# Altium PCB Tigershark 3D R2.PcbDoc (part 4 of 4)
Units mil, origin at the board's own origin, x right, y up, seen from the top; angles counter-clockwise.
Board outline 4100 x 4050 mil, 4 copper layers (Top Layer, Groun Plane, Power Plane, Bottom Layer), stack 61.73 mil thick; 349 components, 235 nets, 1133 pads, 579 vias.
Unrouted connection lines stored in the file: 67.
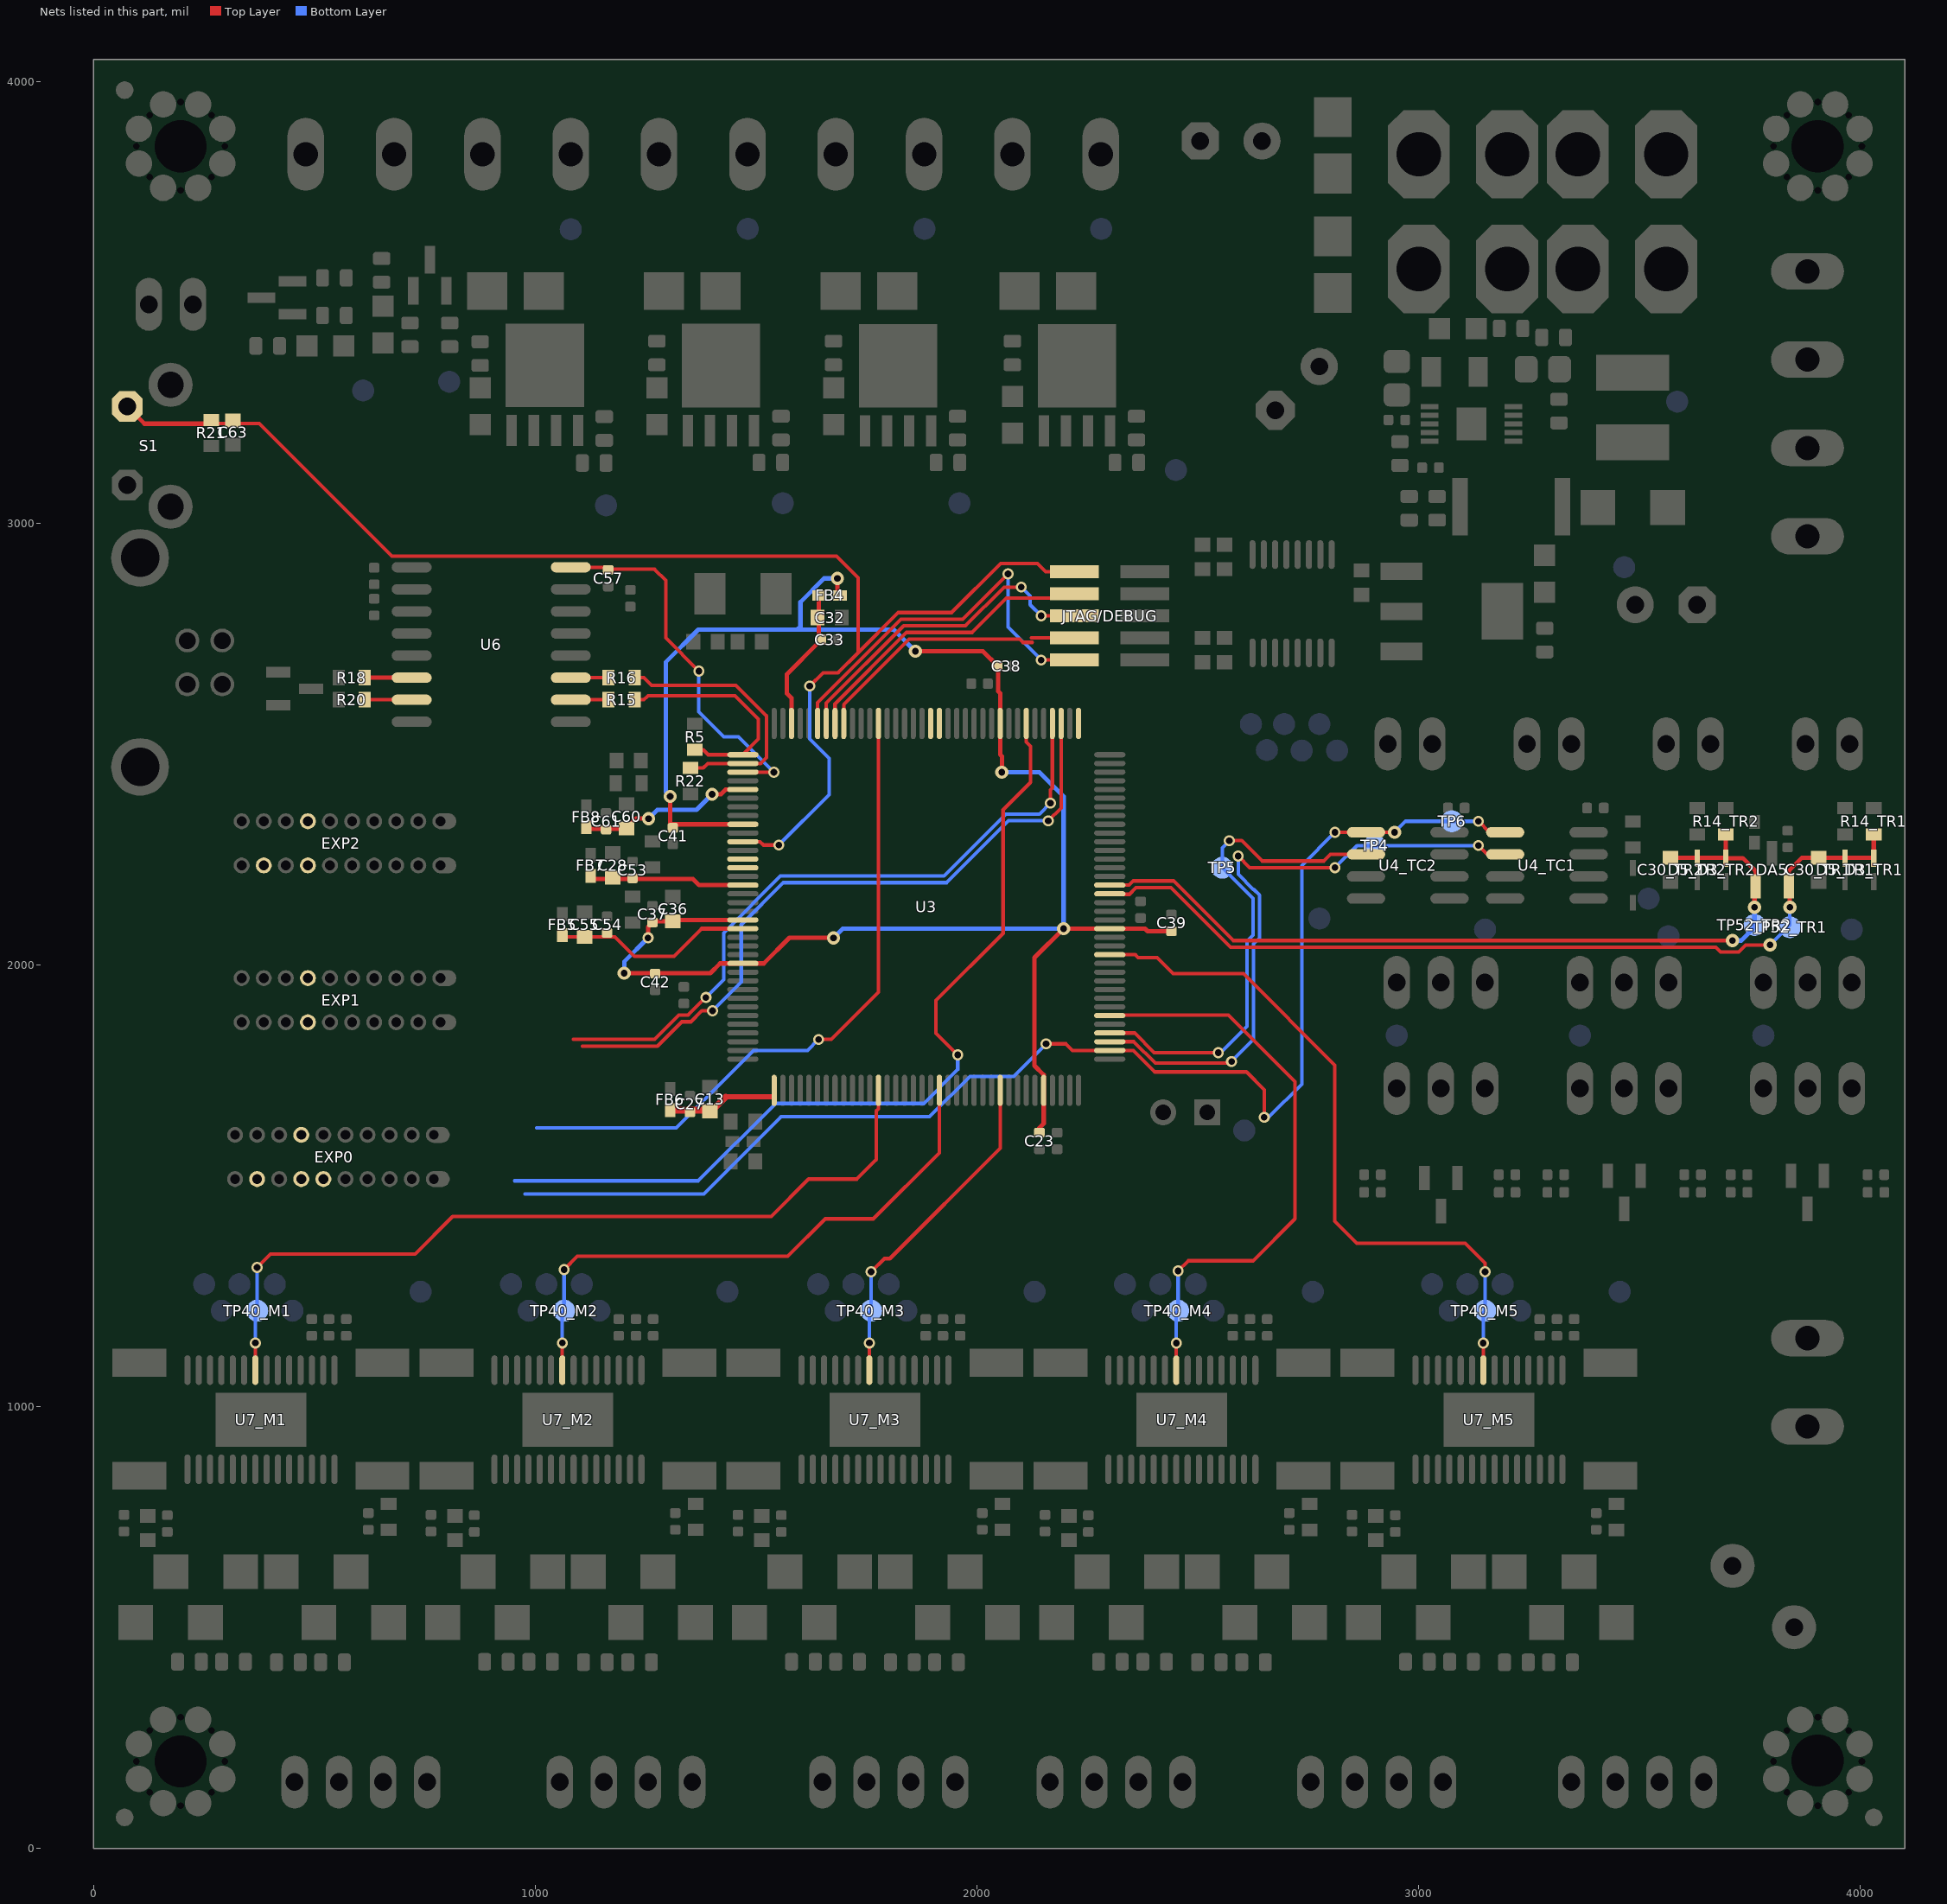
[diagram p6: the nets of this part, all layers, seen from the top]

## Via types
v1: diameter 30, hole 15, Top Layer to Bottom Layer, tented both sides, 304 vias
v2: diameter 25, hole 15, Top Layer to Bottom Layer, tented both sides, 108 vias
v3: diameter 25, hole 15, Top Layer to Bottom Layer, 81 vias
v4: diameter 19.68, hole 7.87, Top Layer to Bottom Layer, 75 vias
v5: diameter 30, hole 15, Top Layer to Bottom Layer, 9 vias
v6: diameter 45, hole 20, Top Layer to Bottom Layer, tented both sides, 2 vias

## Nets (pads, with @x,y where several pads share a name; then routed paths per layer and width w, separated by ;. In a path a pad name is that pad's centre, name@x,y a point inside that pad or via, vN(x,y) a via of type N, cw(c..) or ccw(c..) an arc to the next point about the centre after c; other vN are vias at no path point) (continued)
RESET: C63.2 EXP0.5 JTAG/DEBUG.10 R21.1 S1.1 U3.47 | length 3211.5
  Top Layer w8: R21.1@257.47,3225 R21.1@266,3233.53 ; R21.1@274.53,3225 375,3225 675,2925 1681.93,2925 1730.47,2876.46 1730.47,2706.46 ; U3.47@1469.65,2278.74 1508.46,2278.74 1516.1,2271.1 v2(1551.1,2271.1) ; v2(1621.1,2631.1) 1651.1,2661.1 1685.12,2661.1 1730.47,2706.46 ; JTAG/DEBUG.10@2220.08,2890 2155,2890 2136.5,2908.5 2053.5,2908.5 1942.46,2797.46 1821.47,2797.46 1730.47,2706.46
  Top Layer w10: S1.1@76,3264 115,3225 R21.1@257.47,3225
  Bottom Layer w8: v2(1551.1,2271.1) 1665,2385 1665,2467.2 1621.1,2511.1 v2(1621.1,2631.1)
RXD0: EXP2.17 U3.3 | length 1574.6
  Top Layer w8: 1106.25,1816.1 1276.25,1816.1 1331.15,1871 1351.89,1871 1376.99,1896.1 v2(1401.1,1896.1) ; v2(2161.1,2326.1) 2190.12,2355.12 U3.3@2190.12,2546.46
  Bottom Layer w8: v2(1401.1,1896.1) 1466.1,1961.1 1466.1,2091.1 1561.1,2186.1 1931.1,2186.1 2071.1,2326.1 v2(2161.1,2326.1)
RXD1: EXP0.17 U3.18
SCLK: EXP0.2 EXP2.2 TP6.1 U3.110 U4_TC1.5 U4_TC2.5 | length 3043.3
  Top Layer w8: v2(2156.1,1821.1) 2201.1,1821.1 2215.91,1806.3 U3.110@2300.35,1806.3 2353.48,1806.3 2402.18,1757.6 2609.6,1757.6 2650,1717.2 v2(2650,1655) ; v2(2810,2300) U4_TC2.5@2880.51,2300 v1(2945,2300) ; v2(3135,2325) 3160,2300 U4_TC1.5@3195.51,2300
  Bottom Layer w8: 976.1,1481.1 1381.1,1481.1 1556.1,1656.1 1892.32,1656.1 1983.82,1747.6 2082.6,1747.6 v2(2156.1,1821.1) ; v2(2650,1655) 2660,1655 2735,1730 2735,2225 v2(2810,2300) ; v1(2945,2300) 2970,2325 v2(3135,2325)
SHDN: U3.50
SPD: U3.1
STEP1: TP40_M1.1 U3.85 U7_M1.22 | length 1887.3
  Top Layer w8: U7_M1.22@365.94,1083.46 v3(365.94,1143.9) ; v3(370,1315) 400,1345 727.57,1345 812.57,1430 1533.64,1430 1618.64,1515 1728.02,1515 1772.05,1559.03 1772.05,1669.47 1776.73,1674.16 U3.85@1776.73,1715.75
  Bottom Layer w8: v3@365.74,1144.1 v3(365.94,1143.9) 365.94,1213.01 TP40_M1.1@369.97,1217.03 v3@369.97,1307.03
STEP2: TP40_M2.1 U3.92 U7_M2.22 | length 1326
  Top Layer w8: U7_M2.22@1060.94,1083.46 v3(1060.94,1143.9) ; v3(1065,1310) 1095,1340 1570.92,1340 1655.92,1425 1765.29,1425 1914.53,1574.23 U3.92@1914.53,1715.75
  Bottom Layer w8: v3@1060.74,1144.1 v3(1060.94,1143.9) 1060.94,1213.01 TP40_M2.1@1064.97,1217.03 v3@1064.97,1307.03
STEP3: TP40_M3.1 U3.99 U7_M3.22 | length 764.7
  Top Layer w8: U7_M3.22@1755.94,1083.46 v3(1755.94,1143.9) ; v3(1760,1305) 1790,1335 1802.57,1335 2052.32,1584.75 U3.99@2052.32,1715.75
  Bottom Layer w8: v3@1755.74,1144.1 v3(1755.94,1143.9) 1755.94,1213.01 TP40_M3.1@1759.97,1217.03 v3@1759.97,1307.03
STEP4: TP40_M4.1 U3.114 U7_M4.22 | length 1332.2
  Top Layer w8: U3.114@2300.35,1885.04 2301.42,1886.1 2569.19,1886.1 2720,1735.29 2720,1425 2625,1330 2478,1330 v3(2455,1307) ; U7_M4.22@2450.98,1083.43 v3(2450.98,1143.87)
  Bottom Layer w8: v3@2450.77,1144.07 v3(2450.98,1143.87) 2450.98,1212.98 TP40_M4.1@2455,1217 v3(2455,1307)
STEP5: TP40_M5.1 U3.121 U7_M5.22 | length 1591.1
  Top Layer w8: U3.121@2300.35,2022.83 2358.16,2022.83 2364.89,2016.1 2407.32,2016.1 2443.69,1979.72 2602.85,1979.72 2810,1772.57 2810,1419.34 2859.34,1370 3105,1370 3150,1325 v3(3150,1305) ; U7_M5.22@3145.98,1083.43 v3(3145.98,1143.87)
  Bottom Layer w8: v3@3145.77,1144.07 v3(3145.98,1143.87) 3145.98,1212.98 TP40_M5.1@3150,1217 v3(3150,1305) v3@3150,1307
STEP_EXP1: EXP1.4 U3.7 | length 2004.4
  Top Layer w8: v2(1956.1,1796.1) 1906.71,1845.5 1906.71,1919.28 2058.86,2071.43 2058.86,2350.83 2121,2412.97 2121,2494.99 2111.38,2504.61 U3.7@2111.38,2546.46
  Bottom Layer w8: 952.76,1511.1 1368.68,1511.1 1543.68,1686.1 1879.34,1686.1 1956.1,1762.87 v2(1956.1,1796.1)
STEP_EXP2: EXP1.17 U3.24 | length 1509.9
  Top Layer w8: v2(1641.1,1831.1) 1669.89,1831.1 1776.73,1937.95 U3.24@1776.73,2546.46
  Bottom Layer w8: 1002.46,1631.1 1318.97,1631.1 1493.97,1806.1 1616.1,1806.1 v2(1641.1,1831.1)
TC_CS1: TP4.1 U3.111 U4_TC1.6 | length 1453.6
  Top Layer w8: U3.111@2300.35,1825.98 2355.01,1825.98 2403.39,1777.6 2572.6,1777.6 v2(2576.1,1781.1) ; v2(2591.1,2246.1) 2617.2,2220 v2(2810,2220) ; v2(3135,2270) 3155,2250 U4_TC1.6@3195.51,2250
  Bottom Layer w8: v2(2576.1,1781.1) 2626.1,1831.1 2626.1,2047.2 2639.6,2060.7 2639.6,2157.71 2626.21,2171.1 2625,2171.1 2591.1,2205 v2(2591.1,2246.1) ; v2(2810,2220) 2860,2270 v2(3135,2270)
TC_CS2: TP5.1 U3.112 U4_TC2.6 | length 1149.9
  Top Layer w8: U3.112@2300.35,1845.67 2356.54,1845.67 2401.1,1801.1 v2(2546.1,1801.1) ; v2(2571.1,2281.1) 2598.9,2281.1 2645,2235 2785,2235 2800,2250 U4_TC2.6@2880.51,2250
  Bottom Layer w8: v2(2546.1,1801.1) 2551.1,1801.1 2611.1,1861.1 2611.1,2053.42 2624.6,2066.92 2624.6,2150.29 TP5.1@2555,2219.89 2555,2265 v2(2571.1,2281.1)
TCK/SWDCLK: JTAG/DEBUG.4 U3.28 | length 631.3
  Top Layer w8: U3.28@1697.99,2546.46 1697.99,2589.12 1846.33,2737.46 2096.24,2737.46 2103.7,2730 2125,2730 ; 2123,2740 JTAG/DEBUG.4@2220.08,2740
TDI: JTAG/DEBUG.8 U3.29 | length 689.3
  Top Layer w8: U3.29@1678.31,2546.46 1678.31,2590.65 1840.11,2752.46 1988.67,2752.46 2066.21,2830 2210.08,2830 JTAG/DEBUG.8@2220.08,2840
TDO/SWO: JTAG/DEBUG.6 U3.30 | length 754.7
  Top Layer w8: U3.30@1658.62,2546.46 1658.62,2592.18 1833.9,2767.46 1973.67,2767.46 2061.21,2855 v2(2100,2855) ; v2(2145,2790) JTAG/DEBUG.6@2220.08,2790
  Bottom Layer w8: v2(2100,2855) 2120,2835 2120,2815 v2(2145,2790)
THERM_AN1: C30_TR1.2 D3_TR1.1 D5_TR1.2 DA5.2 R14_TR1.1 TP52_TR1.1 U3.128 | length 2003.6
  Top Layer w8: U3.128@2300.35,2160.63 2301.35,2159.63 2344.63,2159.63 2360,2175 2438.79,2175 2573.79,2040 3672.37,2040 3683.37,2029 3724,2029 3740,2045 v1(3795,2045)
  Top Layer w10: v1(3840,2130) 3840,2175 DA5.2@3837.4,2177.6 3837.4,2212.4 3867.56,2242.56 C30_TR1.2@3905,2242.56 D3_TR1.1@4029.02,2242.56 ; D3_TR1.1@4030,2241.57 R14_TR1.1@4030,2295.47
  Bottom Layer w8: v1(3795,2045) 3840,2090 v1@3840,2120
THERM_AN2: C30_TR2.2 D3_TR2.1 D5_TR2.2 DA5.1 R14_TR2.1 TP52_TR2.1 U3.129 | length 1908.1
  Top Layer w8: U3.129@2300.35,2180.32 2344.1,2180.32 2353.79,2190 2445,2190 2580,2055 v1(3710,2055)
  Top Layer w10: C30_TR2.2@3570,2242.56 D3_TR2.1@3694.02,2242.56 ; R14_TR2.1@3695,2295.47 D3_TR2.1@3695,2241.57 3733.43,2241.57 3762.6,2212.4 DA5.1@3762.6,2177.6 3760,2175 v1(3760,2130)
  Bottom Layer w10: v1(3710,2055) 3730,2055 3760,2085 v1@3760,2120
TMS/SWDIO: JTAG/DEBUG.2 U3.31 | length 900.1
  Top Layer w8: U3.31@1638.94,2546.46 1638.94,2593.71 1827.69,2782.46 1967.46,2782.46 v2(2070,2885) ; v2(2145,2690) JTAG/DEBUG.2@2220.08,2690
  Bottom Layer w8: v2(2070,2885) 2070,2765 v2(2145,2690)
TXD0: EXP2.4 U3.4 | length 1546
  Top Layer w8: 1086.1,1831.1 1270.04,1831.1 1324.93,1886 1345.68,1886 1385.78,1926.1 v2(1386.1,1926.1) ; v2(2166.1,2366.1) 2166.1,2396.1 2170.43,2400.43 U3.4@2170.43,2546.46
  Bottom Layer w8: v2(1386.1,1926.1) 1426.1,1966.1 1426.1,2072.32 1554.89,2201.1 1924.89,2201.1 2064.89,2341.1 2141.1,2341.1 v2(2166.1,2366.1)
TXD1: EXP0.4 U3.17
UD_N: R18.1 U6.6 | length 106.2
  Top Layer w10: R18.1@613.65,2650 U6.6@719.88,2650
UD_P: R20.1 U6.7 | length 106.2
  Top Layer w8: R20.1@613.65,2600 U6.7@719.88,2600
UI_N: R16.2 U6.11 | length 85.4
  Top Layer w8: U6.11@1080.12,2650 1130,2650 R16.2@1165.47,2650
UI_P: R15.2 U6.10 | length 85.4
  Top Layer w8: U6.10@1080.12,2600 1145,2600 R15.2@1165.47,2600
UMCU_N: R16.1 R22.1 U3.38 | length 606.6
  Top Layer w8: R16.1@1224.53,2650 1245.81,2650 1263.2,2632.6 1401.1,2632.6 1453.96,2632.6 1523,2563.56 1523,2468.91 1510,2455.91 U3.38@1469.65,2455.91 1390.28,2455.91 1380,2445.63 R22.1@1355,2445.63
UMCU_P: R5.1 R15.1 U3.37 | length 520.8
  Top Layer w8: R15.1@1224.53,2600 1245.81,2600 1253.13,2607.32 1255.16,2609.35 1451.75,2609.35 1505,2556.1 1505,2510.94 U3.37@1469.65,2475.59 1390.98,2475.59 1380,2486.57 R5.1@1361.1,2486.57 R5.1@1355,2486.57
VBUS: C57.2 U3.39 U6.16 | length 852
  Top Layer w8: U6.16@1080.12,2900 1159,2900 1163.65,2895.35 1269.65,2895.35 ; 1270,2895 1295,2870 1295,2740 v2(1370,2665) ; U3.39@1469.65,2436.22 v2@1540,2436.22
  Bottom Layer w8: v2(1370,2665) 1370,2572.87 1426.77,2516.1 1460,2516.1 v2(1540,2436.1)
VDDANA: C13.2 C27.2 FB6.2 U3.73 | length 247.4
  Top Layer w12: 1431.1,1701.1 U3.73@1540,1701.1
  Top Layer w15: FB6.2@1305,1671.1 1401.1,1671.1 1431.1,1701.1
VDDBU: C28.2 C53.2 FB7.2 U3.52 | length 355.2
  Top Layer w10: FB7.2@1123.62,2202.48 1131.6,2194.5 1356.6,2194.5 1370.79,2180.32 U3.52@1469.65,2180.32
VDDIN: C54.2 C55.2 FB5.2 U3.57 | length 471.3
  Top Layer w8: FB5.2@1056.22,2077.48 FB5.2@1060.16,2073.54 ; FB5.2@1058.94,2063.54 1179.83,2063.54 1224.37,2019 1314,2019 1376.89,2081.89 ; C54.2@1156.22,2073.54 C54.2@1163.66,2066.1
  Top Layer w10: 1376.89,2081.89 U3.57@1469.65,2081.89
VDDOUT: C23.2 C36.2 C37.2 C38.2 C39.2 C41.2 C42.2 FB4.1 U3.10 U3.45 U3.56 U3.61 U3.104 U3.124 | length 4400.6
  Top Layer w10: v1(1201.1,1981.1) 1396.1,1981.1 1418.15,2003.15 U3.61@1469.65,2003.15 1517.05,2003.15 1575,2061.1 v1(1675,2061.1) ; v2(1255,2061.1) 1255,2086 1267.54,2098.54 1305,2098.54 1308.03,2101.57 U3.56@1469.65,2101.57 ; v1(1305,2381.1) 1305,2318.66 C41.2@1305.53,2318.13 ; C41.2@1305.55,2318.11 U3.45@1469.65,2318.11 ; FB4.1@1683.62,2836.1 v1(1683.62,2874.72) ; v1(1860,2710) 2012.93,2710 C38.2@2046.47,2676.46 2047.47,2675.46 2047.47,2619.46 2052.32,2614.61 U3.10@2052.32,2546.46 2052.32,2475.98 2056.1,2472.2 v1(2056.1,2436.1) ; C23.2@2141.1,1620.1 2141.1,1631.1 2150.75,1640.75 U3.104@2150.75,1715.75 2150.75,1750.91 2130,1771.66 2130,2016.1 v1(2195.79,2081.89) U3.124@2300.35,2081.89 2380.22,2081.89 2386.01,2076.1 C39.2@2440,2076.1
  Bottom Layer w10: v1(1201.1,1981.1) 1201.1,2007.2 v2(1255,2061.1) ; v1(1305,2381.1) 1295,2391.1 1295,2685 1368.6,2758.6 1592.5,2758.6 ; v1(1675,2061.1) 1695.79,2081.89 v1(2195.79,2081.89) 2195.79,2381.42 2141.1,2436.1 v1(2056.1,2436.1) ; v1(1683.62,2874.72) 1653.62,2874.72 1600,2821.1 1600,2766.1 1592.5,2758.6 ; v1(1860,2710) 1811.4,2758.6 1592.5,2758.6
VDDPLL: C32.2 C33.2 FB4.2 U3.34 | length 326.1
  Top Layer w10: U3.34@1579.88,2546.46 1579.88,2603.63 1569.1,2614.41 1569.1,2657.44 1641.38,2729.72 1641.38,2831.1 FB4.2@1636.38,2836.1
VDDUTMI: C60.2 C61.2 FB8.2 U3.41 | length 380
  Top Layer w10: FB8.2@1115,2307.48 C60.2@1201.06,2307.48 ; C60.2@1212.56,2316.1 1227.56,2331.1 v1(1256.1,2331.1) ; v1(1400,2386.1) 1420,2386.1 1430.75,2396.85 U3.41@1469.65,2396.85
  Bottom Layer w10: v1@1260,2326.1 1260,2335 1276.1,2351.1 1365,2351.1 v1(1400,2386.1)
XOUT32: U3.49
pads on no net: FD1.1 FD2.1 FD3.1 H1.0 H2.0 H3.0 H4.0 JTAG/DEBUG.7 U3.32 U3.48 U3.127 U3.136 U3.137 U3.138 U4_TC1.8 U4_TC2.8 U7_M1.18 U7_M1.19 U7_M1.23 U7_M1.27 U7_M2.18 U7_M2.19 U7_M2.23 U7_M2.27 U7_M3.18 U7_M3.19 U7_M3.23 U7_M3.27 U7_M4.18 U7_M4.19 U7_M4.23 U7_M4.27 U7_M5.18 U7_M5.19 U7_M5.23 U7_M5.27

## Polygon pours and split planes (outlines as drawn)
GND on Top Layer "Mechanical 15-No Net" (solid, remove dead copper, pour order 71): 582.48,825 582.48,925 722.48,925 725,927.52 725,1358.26 596.74,1358.26 594.97,1360.03 589.97,1355.03 589.97,1225.03 589.97,1037.49 587.48,1035 587.45,1035.03 464.97,1035.03 212.51,1035.03 212.48,1035 209.97,1037.51 209.97,1355.03 29.97,1355.03 32.48,1352.52 32.48,925 162.48,925 187.48,900 542.48,900 542.48,825
GND on Top Layer "Mechanical 15-No Net" (solid, remove dead copper, pour order 71): 1277.48,825 1277.48,925 1417.48,925 1420,927.52 1420,1358.26 1291.74,1358.26 1289.97,1360.03 1284.97,1355.03 1284.97,1225.03 1284.97,1037.49 1282.48,1035 1282.45,1035.03 1159.97,1035.03 907.51,1035.03 907.48,1035 904.97,1037.51 904.97,1355.03 724.97,1355.03 727.48,1352.52 727.48,925 857.48,925 882.48,900 1237.48,900 1237.48,825
GND on Top Layer "Mechanical 15-No Net" (solid, remove dead copper, pour order 71): 1972.48,825 1972.48,925 2112.48,925 2115,927.52 2115,1358.26 1986.74,1358.26 1984.97,1360.03 1979.97,1355.03 1979.97,1225.03 1979.97,1037.49 1977.48,1035 1977.45,1035.03 1854.97,1035.03 1602.51,1035.03 1602.48,1035 1599.97,1037.51 1599.97,1355.03 1419.97,1355.03 1422.48,1352.52 1422.48,925 1552.48,925 1577.48,900 1932.48,900 1932.48,825
GND on Top Layer "Mechanical 15-No Net" (solid, remove dead copper, pour order 71): 2667.51,824.97 2667.51,924.97 2807.51,924.97 2810.03,927.49 2810.03,1358.23 2681.77,1358.23 2680,1360 2675,1355 2675,1225 2675,1037.46 2672.51,1034.97 2672.48,1035 2550,1035 2297.54,1035 2297.51,1034.97 2295,1037.48 2295,1355 2115,1355 2117.51,1352.49 2117.51,924.97 2247.51,924.97 2272.51,899.97 2627.51,899.97 2627.51,824.97
GND on Top Layer "Mechanical 15-No Net" (solid, remove dead copper, pour order 79): 545,3530 545,3580 600,3580 600,3625 332.07,3625 330,3625 330,3620 330,3575 370,3535 375,3530 490,3530
GND on Top Layer "Mechanical 15-No Net" (solid, remove dead copper, pour order 77): 790,3435 830,3435 830,3675 820,3675 820,3775 725,3775 725,3695 785,3635 785,3630 785,3435
+12VCC2 on Top Layer "Mechanical 15-No Net" (solid, remove dead copper, pour order 75): 825,4030 825,3685 840,3685 840,3480 855,3480 855,3395 915,3395 915,3480 945,3480 945,3760 945,4030
GND on Top Layer "Mechanical 15-No Net" (solid, remove dead copper, pour order 73): 2840,2860 2840,2655 2845,2650 2895,2650 2895,2755 2980,2755 3125,2755 3125,2730 3250,2730 3250,2875 3250,2880 3255,2875 3320,2875 3325,2880 3330,2880 3545,2880 3545,2660 4080,2660 4080,3080 3745,3080 3740,3075 3610,3075 3610,2975 3595,2960 3270,2960 3065,2960 3030,2925 3025,2920 3025,2860
GND on Top Layer "Mechanical 15-No Net" (solid, remove dead copper, pour order 71): 3362.51,824.97 3362.51,924.97 3502.51,924.97 3505.03,927.49 3505.03,1358.23 3376.77,1358.23 3375,1360 3370,1355 3370,1225 3370,1037.46 3367.51,1034.97 3367.48,1035 3245,1035 2992.54,1035 2992.51,1034.97 2990,1037.48 2990,1355 2810,1355 2812.51,1352.49 2812.51,924.97 2942.51,924.97 2967.51,899.97 3322.51,899.97 3322.51,824.97
GND on Top Layer "Mechanical 15-No Net" (solid, remove dead copper, pour order 69): 2740,3605 2875,3605 2875,3685 2880,3690 2860,3690 2860,3845 2855,3840 2760,3840 2760,3810 2760,3805 2625,3805 2625,3255 2390,3255 2390,3150 2680,3150 2720,3150 2720,3380 2720,3605
NetD12_1 on Top Layer "Mechanical 15-No Net" (solid, remove dead copper, pour order 65): 845,3280 845,3195 920,3195 920,3255 980,3255 1120,3255 1120,3265 1195,3265 1195,4030 950,4030 950,3475 925,3475 925,3395 925,3335 905,3335 905,3280
NetD14_C on Top Layer "Mechanical 15-No Net" (solid, remove dead copper, pour order 65): 1245,3280 1245,3195 1320,3195 1320,3255 1380,3255 1520,3255 1520,3265 1595,3265 1595,4030 1350,4030 1350,3475 1325,3475 1325,3395 1325,3335 1305,3335 1305,3280
NetD16_C on Top Layer "Mechanical 15-No Net" (solid, remove dead copper, pour order 65): 1645,3280 1645,3195 1720,3195 1720,3255 1780,3255 1920,3255 1920,3265 1995,3265 1995,4030 1750,4030 1750,3475 1725,3475 1725,3395 1725,3335 1705,3335 1705,3280
+12VCC2 on Top Layer "Mechanical 15-No Net" (solid, remove dead copper, pour order 26): 1200,4025 1200,3400 1320,3400 1320,3480 1345,3480 1345,4025
+12VCC2 on Top Layer "Mechanical 15-No Net" (solid, remove dead copper, pour order 26): 1600,4025 1600,3400 1720,3400 1720,3480 1745,3480 1745,4025
+5VCC on Top Layer "Mechanical 15-No Net" (solid, remove dead copper, pour order 58): 2840,3010 2840,2870 3015,2870 3015,2920 2935,2920 2935,3010
3.3VCC on Top Layer "Mechanical 15-No Net" (solid, remove dead copper, pour order 54): 2900,2750 2900,2655 3540,2655 3540,2875 3320,2875 3315,2870 3315,2735 3315,2725 3120,2725 3120,2750
+12VCC3 on Top Layer "Mechanical 15-No Net" (solid, remove dead copper, pour order 49): 3270,3700 3270,4025 2630,4025 2630,3915 2630,3810 2750,3810 2750,3855 2755,3850 2865,3850 2865,3735 2930,3735 2865,3735 2865,3700 2965,3700
+12VCC2 on Top Layer "Mechanical 15-No Net" (solid, remove dead copper, pour order 47): 3275,3470 3275,3685 3280,3690 2880,3690 2880,3595 2740,3595 2740,3470 2740,3400 2725,3385 2725,3325 2725,3155 2730,3150 2875,3150 2875,3425 3015,3425 3015,3475 3265,3475
NetF1_1 on Top Layer "Mechanical 15-No Net" (solid, remove dead copper, pour order 45): 3730,3085 4075,3085 4075,3310 4075,3435 4065,3435 4065,3300 4065,3435 3865,3435 3865,3300 3865,3435 3785,3435 3785,3300 3785,3435 3730,3435 3715,3435 3715,3690 3280,3690 3280,3455 3285,3450 3395,3450 3395,3400 3555,3400 3605,3400 3610,3395 3610,3085
NetF2_1 on Top Layer "Mechanical 15-No Net" (solid, remove dead copper, pour order 43): 4075,3450 3730,3450 3730,3695 3725,3700 3350,3700 3280,3700 3280,4025 4075,4025
NetD2_A on Top Layer "SMPS" (solid, pour order 24): 3259,3206 3259,3070 3259,3021 3308,2972 3421,2972 3445,2996 3445,3085 3433,3097 3416,3097 3335,3178 3308,3205 3262,3205
NetC40_2 on Top Layer "SMPS" (solid, pour order 25): 3256,3239 3278.77,3216.23 3323,3216.23 3429.23,3110 3445,3110 3461,3094 3461,3018 3499,2980 3585,2980 3603,2998 3603,3080 3603,3193 3557,3239 3546,3250 3274,3250 3259,3250 3256,3247
GND on Top Layer "SMPS" (solid, pour order 33): 3242,3173 3214,3145 3126,3145 3076,3095 3076,2972 3201,2972 3250,3021 3252,3023 3252,3156 3252,3173
GND on Top Layer "Mechanical 15-No Net" (solid, remove dead copper, pour order 37): 790,3165 790,3065 795,3060 1105,3060 1105,3125 1065,3125 1065,3250 925,3250 925,3165
GND on Top Layer "Mechanical 15-No Net" (solid, remove dead copper, pour order 36): 1188.5,3164.61 1188.5,3064.61 1193.5,3059.61 1503.5,3059.61 1503.5,3124.61 1463.5,3124.61 1463.5,3249.61 1323.5,3249.61 1323.5,3164.61
GND on Top Layer "Mechanical 15-No Net" (solid, remove dead copper, pour order 35): 1589.5,3164.19 1589.5,3064.19 1594.5,3059.19 1904.5,3059.19 1904.5,3124.19 1864.5,3124.19 1864.5,3249.19 1724.5,3249.19 1724.5,3164.19
GND on Top Layer "Mechanical 15-No Net" (solid, remove dead copper, pour order 34): 1994.5,3164.19 1994.5,3064.19 1999.5,3059.19 2309.5,3059.19 2309.5,3124.19 2269.5,3124.19 2269.5,3249.19 2129.5,3249.19 2129.5,3164.19
+12VCC3 on Top Layer "Mechanical 15-No Net" (solid, remove dead copper, pour order 26): 2000,4025 2000,3400 2120,3400 2120,3480 2145,3480 2145,4025
NetD18_C on Top Layer "Mechanical 15-No Net" (solid, remove dead copper, pour order 29): 2055,3175 2125,3175 2125,3255 2130,3260 2235,3260 2620,3260 2620,4025 2155,4025 2155,3475 2125,3475 2125,3395 2125,3285 2110,3285 2110,3255 2055,3255
GND on Bottom Layer "SMPS GND" (solid, pour order 47): 3685,2925 3655,2895 2888,2895 2849,2934 2849,3440 2886,3477 3662,3477 3685,3454 3685,2925
NetF1_1 on Bottom Layer "Mechanical 15-No Net" (solid, remove dead copper, pour order 93): 3280,3480 3280,3495 3280,3680 3290,3690 3310,3690 3715,3690 3715,3675 3715,3435 3785,3435 3785,3300 3785,3435 4080,3435 4080,3300 4080,3085 3940,3085 3610,3085 3610,3395 3605,3400 3395,3400 3395,3465 3360,3465 3280,3465
+12VCC2 on Bottom Layer "Mechanical 15-No Net" (solid, remove dead copper, pour order 91): 3275,3690 2400,3690 2400,3600 2400,3590 2355,3590 1990,3590 1990,3620 1990,4030 1595,4030 20,4030 20,3380 2005,3370 2005,3145 2005,3020 2875,3020 2875,3145 2875,3380 2875,3475 3275,3475
GND on Bottom Layer "Mechanical 15-No Net" (solid, remove dead copper, pour order 85): 34.97,770.03 69.97,770.03 724.97,770.03 724.97,795.03 724.97,1355.03 34.97,1355.03
GND on Bottom Layer "Mechanical 15-No Net" (solid, remove dead copper, pour order 85): 729.97,770.03 764.97,770.03 1419.97,770.03 1419.97,795.03 1419.97,1355.03 729.97,1355.03
GND on Bottom Layer "Mechanical 15-No Net" (solid, remove dead copper, pour order 85): 1424.97,770.03 1459.97,770.03 2114.97,770.03 2114.97,795.03 2114.97,1355.03 1424.97,1355.03
GND on Bottom Layer "Mechanical 15-No Net" (solid, remove dead copper, pour order 85): 2120,770 2155,770 2810,770 2810,795 2810,1355 2120,1355
GND on Bottom Layer "Mechanical 15-No Net" (solid, remove dead copper, pour order 85): 2815,770 2850,770 3505,770 3505,795 3505,1355 2815,1355
+12VCC1 on Bottom Layer "Mechanical 15-No Net" (solid, remove dead copper, pour order 56): 4080,1280 4080,1355 3785,1355 3510,1355 3510,1280 3510,765 3350,765 1835,765 20,765 20,395 4080,395
NetF2_1 on Bottom Layer "Mechanical 15-No Net" (solid, remove dead copper, pour order 43): 4075,3450 3730,3450 3730,3695 3725,3700 3350,3700 3280,3700 3280,4025 4075,4025
+12VCC3 on Bottom Layer "Mechanical 15-No Net" (solid, remove dead copper, pour order 51): 3270,3700 3270,3955 2000,3955 2000,3700 2000,3600 2390,3600 2390,3700
+12VCC3 on Power Plane (split plane): 4079.9,3700.1 2010.1,3700.1 2010.1,4029.9 4079.9,4029.9
+5VCC on Power Plane (split plane): 3594.9,2882.11 3591.4,2878.6 3590.29,2876.95 3589.92,2875.1 2837.11,2875.1 2835.1,2877.11 2835.1,3097.89 3067.11,3329.9 3594.9,3329.9
+12VCC2 on Power Plane (split plane): 1999.9,3695 2000.29,3693.05 2001.4,3691.4 2003.05,3690.29 2005,3689.9 4079.9,3689.9 4079.9,2875.1 3602.31,2875.1 3603.6,2876.4 3604.71,2878.05 3605.1,2880 3605.1,3335 3604.71,3336.95 3603.6,3338.6 3601.95,3339.71 3600,3340.1 3065,3340.1 3063.05,3339.71 3061.4,3338.6 2826.4,3103.6 2825.29,3101.95 2824.9,3100 2824.9,2875.1 2600.1,2875.1 2600.1,2970 2599.71,2971.95 2598.6,2973.6 2588.6,2983.6 2586.95,2984.71 2585,2985.1 897.11,2985.1 478.6,3403.6 476.95,3404.71 475,3405.1 20.1,3405.1 20.1,4029.9 1999.9,4029.9
3.3VCC on Power Plane (split plane): 891.4,2976.4 893.05,2975.29 895,2974.9 2582.89,2974.9 2589.9,2967.89 2589.9,2870 2590.29,2868.05 2591.4,2866.4 2593.05,2865.29 2595,2864.9 4079.9,2864.9 4079.9,1295.1 3510,1295.1 3508.05,1294.71 3506.4,1293.6 3505.29,1291.95 3504.9,1290 3504.9,975.1 20.1,975.1 20.1,3394.9 472.89,3394.9
+12VCC1 on Power Plane (split plane): 4079.9,20.1 20.1,20.1 20.1,964.9 3510,964.9 3511.95,965.29 3513.6,966.4 3514.71,968.05 3515.1,970 3515.1,1284.9 4079.9,1284.9
INPUT_GND on Groun Plane (split plane): 894.9,2375.1 20.1,2375.1 20.1,2994.9 894.9,2994.9
GND on Groun Plane (split plane): 4079.9,20.1 20.1,20.1 20.1,2364.9 900,2364.9 901.95,2365.29 903.6,2366.4 904.71,2368.05 905.1,2370 905.1,3000 904.71,3001.95 903.6,3003.6 901.95,3004.71 900,3005.1 20.1,3005.1 20.1,4029.9 4079.9,4029.9

## Keep-outs
Keep-Out Layer:
  lines w10: 20,20 20,4030 4080,4030 4080,20 20,20

## Other copper
Groun Plane (plane layer: these items are gaps in the copper):
  lines w10: 0,2370 900,2370 900,3000 90.28,3000 15.28,3000 5.63,3009.65 ; 5.63,2359.65 15.98,2370
Power Plane (plane layer: these items are gaps in the copper):
  lines w10: 0,0 1.08,970 3510,970 3510,1290 4095,1290 ; 0,3400 475,3400 895,2980 2585,2980 2595,2970 2595,2870 3310,2870 4100,2870 ; 2005,4055 2005,3695 2875,3695 3220,3695 4100,3695 ; 2965,2870 2835,2870 2830,2875 2830,3100 3065,3335 3600,3335 3600,2880 3595,2875

## Silkscreen, mask and mechanical layers (free items; w line width, h text height)
Top Overlay:
  lines w10: 3650,3170 3680,3170 3720,3170 ; 3685,2930 3685,3000 ; 3685,3135 3685,3205 ; 3685,3330 3685,3400 ; 3700,3745 3730,3745 3770,3745 ; 3735,3710 3735,3780
  lines w15: 3640,1150 3670,1150 3710,1150 ; 3675,910 3675,980 ; 3675,1115 3675,1185
  text "HEATBED" at 3410,3940 h75
  text "MOSFETs" at 3415,3680 h75
  text "FAN-0" at 70,3655 h90
  text "FAN-1" at 355,3625 h90
  text "HEAT-0" at 840,3590 h100
  text "HEAT-1" at 1200,3590 h100
  text "HEAT-2" at 1595,3590 h100
  text "HEATBED" at 1995,3590 h100
  text "AVR" at 2560,3415 h160 r90
  text "S" at 440,2990 h200
  text "TR0" at 3675,2665 h60
  text "TC-0" at 2835,2660 h60
  text "TC1" at 3330,2660 h60
  text "TR1" at 3975,2660 h60
  text "UltiMachine.com TN USA" at 70,2370 h110 r270
  text "Designed By" at 2630,1910.15 h90 r90
  text "MAX" at 2840,1855 h120 r90
  text "Tigershark" at 2555,1805 h180 r90
  text "Adam Vadala-Roth" at 2695,1760.29 h90 r90
  text "ERASE" at 2371.1,1726.1 h75
  text "b" at 9670,1620 h245
  text "MIN" at 2845,1590 h120 r90
  text "Z" at 3740,1365 h150
  text "X" at 2890,1360 h150
  text "Y" at 3320,1360 h150
  text "S" at 9620,1310 h1200
  text "MTR PWR 24V" at 3605,785 h100 r90
  text "Z" at 1550,275 h150
  text "E0" at 2625,275 h150
  text "E1" at 3205,275 h150
  text "X" at 355,270 h150
  text "Y" at 960,270 h150
Bottom Overlay:
  drawing of 2 lines, arcs and shapes, not listed
  text "G" at 11640.52,4072.26 h310
  text "Tigershark 3D" at 3610,1020 h250
  text "Based On the Work of Ultimachine," at 3630,895 h135
  text "Arduino, RepRap, and Synthetos.com" at 3630,805 h135
  text "Developed by Adam Vadala-Roth in" at 3630,715 h135
  text "collaboration with Johnny Russell" at 3630,625 h135
  text "and Alden Hart" at 3630,540 h135
  text "TinyG2 Powered" at 1485,360 h120
  text "#YOLO-SWAG" at 2635,340 h200
  text "AVR" at 2950,280 h200
  text "Made by Ultimachine in Tennessee USA" at 2630,240 h150
  text "S" at 3355,225 h2000
  text "S" at 3670,215 h175
  text "Released as Open Source Hardware Under the CERN Open Hardware Liscense" at 4025,35 h125
Mechanical 15:
  the board outline again, w10

## Dimensions
0,4050 to 4100,4050 on Mechanical 1

## Text inside footprints (layer, text, board x,y; h text height)
C7: Top Overlay "+" at 3548.94,756.52 h77.5 r315; Top Overlay "+" at 3610.18,695.27 h77.5 r315
FAN-1: Mechanical 16 "1" at 287.5,3557.5 h62 r180
"Heat Power": Top Overlay "1" at 3795,3655 h77.5 r270; Top Overlay "2" at 3795,3470 h77.5 r270; Top Overlay "3" at 3795,3270 h77.5 r270; Top Overlay "4" at 3795,3070 h77.5 r270
MAX1_ES1: Mechanical 16 "1" at 2887.5,1657.5 h62
MAX1_ES2: Mechanical 16 "1" at 3717.5,1657.5 h62
MAX1_ES3: Mechanical 16 "1" at 3302.5,1657.5 h62
MIN1_ES1: Mechanical 16 "1" at 3212.5,2022.5 h62 r180
MIN1_ES2: Mechanical 16 "1" at 4042.5,2022.5 h62 r180
MIN1_ES3: Mechanical 16 "1" at 3627.5,2022.5 h62 r180
"Motor Power": Top Overlay "1" at 3795,1240 h77.5 r270; Top Overlay "2" at 3795,1055 h77.5 r270
P2_TR1: Mechanical 16 "1" at 4037.5,2562.5 h62 r180
P2_TR2: Mechanical 16 "1" at 3722.5,2562.5 h62 r180
T1: Top Overlay "4" at 980,3750 h77.5; Top Overlay "3" at 780,3750 h77.5; Top Overlay "2" at 580,3750 h77.5; Top Overlay "1" at 395,3750 h77.5
T2_TC1: Mechanical 16 "1" at 3407.5,2562.5 h62 r180
T2_TC2: Mechanical 16 "1" at 3092.5,2562.5 h62 r180
U3: Top Overlay "R" at 1833.56,1983.83 h37.2 r270; Top Overlay "TQFP 144" at 1778.05,2228.46 h49.6 r270